# Altium PCB ETAPA DE POTENCIA (TERMINADA).PcbDoc
Units mm, origin at the board's own origin, x right, y up, seen from the top; angles counter-clockwise.
Board outline 150.5 x 70.87 mm, 2 copper layers (Top Layer, Bottom Layer); 61 components, 44 nets, 172 pads, 0 vias.
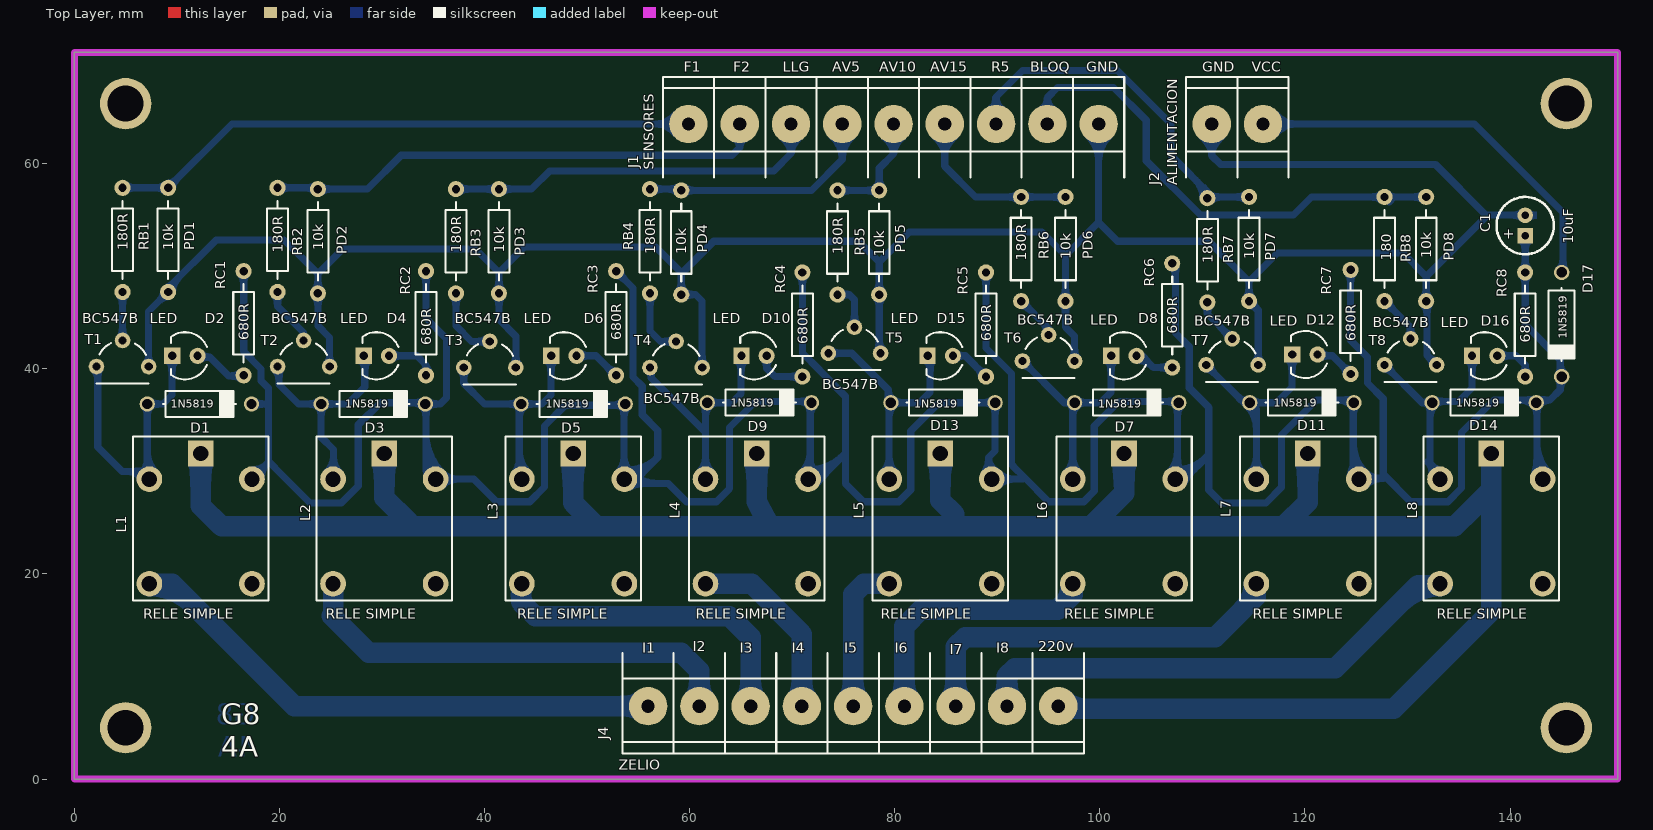
[diagram p0: Top Layer view]
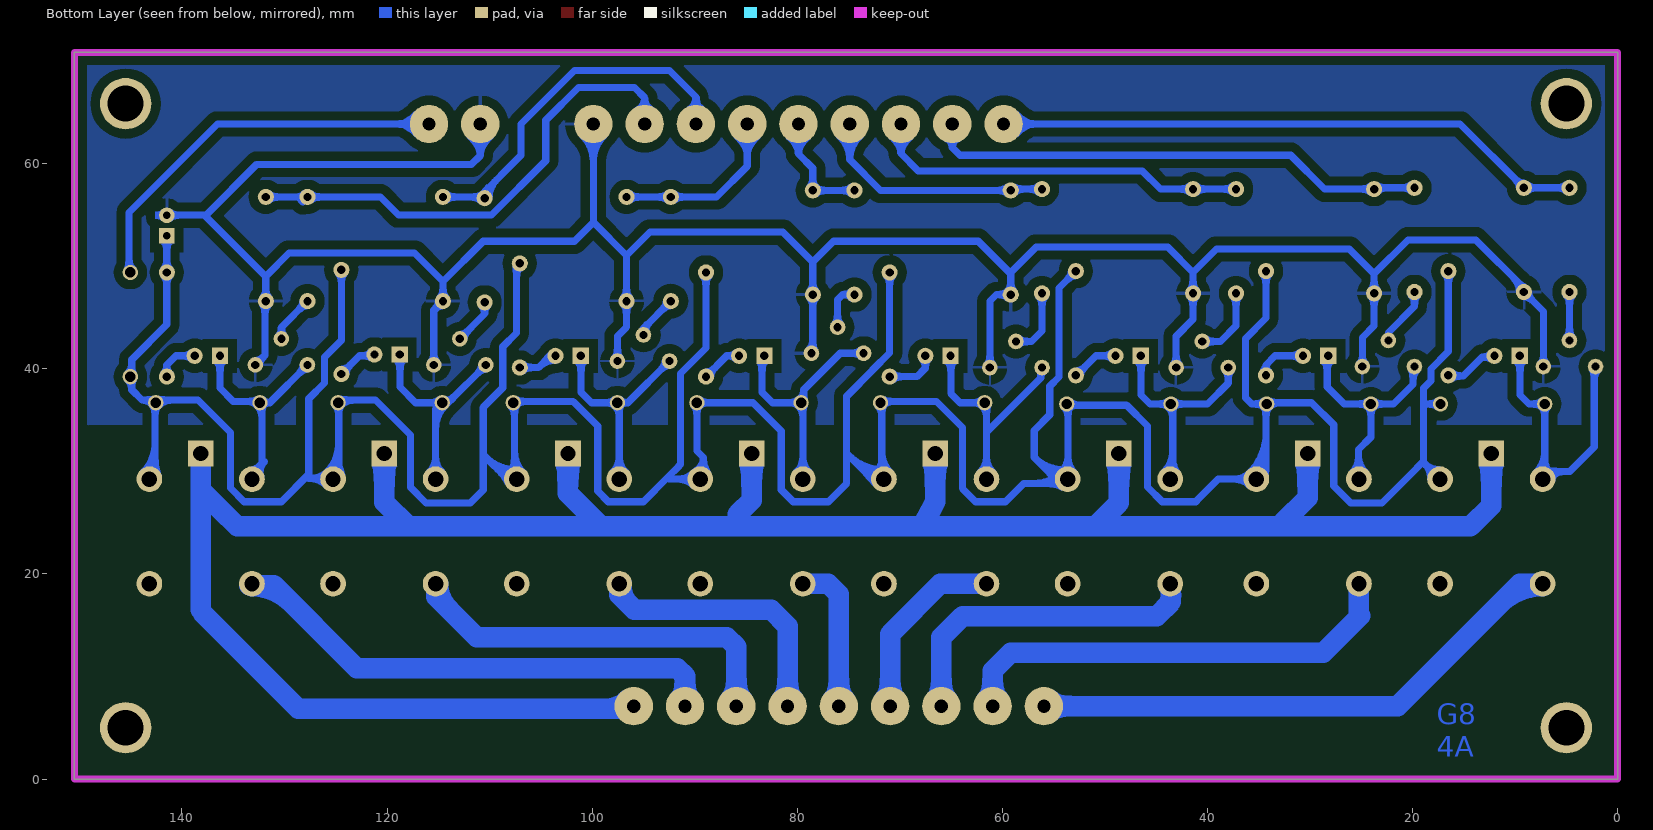
[diagram p1: Bottom Layer view, seen from below]

## Layer stack, top to bottom
Top Solder: solder mask 0.0102, Solder Resist, Dk 3.5
Top Layer: signal copper 0.0356
Dielectric1: dielectric 0.32, FR-4, Dk 4.8
Bottom Layer: signal copper 0.0356
Bottom Solder: solder mask 0.0102, Solder Resist, Dk 3.5

## Board outline
0,0 0,70.866 150.495,70.866 150.495,0

## Design rules (kind name [scope] priority, off if disabled: settings)
Clearance POLYGON [InPolygon] p1: gap=0.9
Clearance [All] p2: gap=0.3
PolygonConnect [All] p1: connectstyle=Relief reliefconductorwidth=0.254 reliefentries=4 polygonreliefangle="90 Angle" airgapwidth=0.254
RoutingVias [All] p1: holewidth=0.711 width=1.27 viastyle="Through Hole" minholewidth=0.711 minwidth=1.27 maxholewidth=0.711 maxwidth=1.27
SilkToSolderMaskClearance SilkscreenOverComponentPads [IsPad] p1: minsilkscreentomaskgap=0.254 clearancetoexposedcopper=TRUE
SolderMaskExpansion [All] p1: expansion=0.102
Width [All] p1: maxlimit=2 minlimit=0.254 preferedwidth=0.7 toplayer_maxwidth=0.254 toplayer_prefwidth=0.254 bottomlayer_minwidth=0.7 minimp=50.000000 maximp=50.000000 favimp=50.000000
29 further rules are at their usual default settings.

## Components (designator, comment, footprint, x,y, rotation, side; value= is the part's Value field where it differs from the comment)
C1 "10uF" CAP100RP 141.478,53.975 r90 top
D1 "" DO41 12.192,36.576 r0 top
D2 "LED" LED3 10.795,41.275 r180 top
D3 "1N5819" DO41 29.146,36.576 r0 top
D4 "LED" LED3 29.464,41.275 r180 top
D5 "1N5819" DO41 48.641,36.576 r0 top
D6 "LED" LED3 47.752,41.275 r180 top
D7 "1N5819" DO41 102.616,36.703 r0 top
D8 "LED" LED3 102.362,41.275 r180 top
D9 "1N5819" DO41 66.802,36.703 r0 top
D10 "LED" LED3 66.294,41.275 r180 top
D11 "1N5819" DO41 119.697,36.703 r0 top
D12 "LED" LED3 120.015,41.402 r180 top
D13 "1N5819" DO41 84.709,36.703 r0 top
D14 "1N5819" DO41 137.477,36.703 r0 top
D15 "LED" LED3 84.455,41.275 r180 top
D16 "LED" LED3 137.541,41.275 r180 top
D17 "1N5819" DO41 145.034,44.323 r270 top
J1 "SENSORES" BORNERA9 79.883,63.881 r270 top
J2 "ALIMENTACION" BORNERA2 113.411,63.881 r270 top
J4 "ZELIO" BORNERA9 75.946,7.112 r90 top
L1 "RELE SIMPLE" "RELE SERIE 964" 12.319,25.4 r270 top
L2 "RELE SIMPLE" "RELE SERIE 964" 30.226,25.4 r270 top
L3 "RELE SIMPLE" "RELE SERIE 964" 48.641,25.4 r270 top
L4 "RELE SIMPLE" "RELE SERIE 964" 66.548,25.4 r270 top
L5 "RELE SIMPLE" "RELE SERIE 964" 84.455,25.4 r270 top
L6 "RELE SIMPLE" "RELE SERIE 964" 102.362,25.4 r270 top
L7 "RELE SIMPLE" "RELE SERIE 964" 120.269,25.4 r270 top
L8 "RELE SIMPLE" "RELE SERIE 964" 138.176,25.4 r270 top
PD1 "10k" RES400 9.144,47.498 r90 top
PD2 "10k" RES400 23.749,47.371 r90 top
PD3 "10k" RES400 41.402,47.371 r90 top
PD4 "10k" RES400 59.182,47.244 r90 top
PD5 "10k" RES400 78.486,47.244 r90 top
PD6 "10k" RES400 96.647,46.609 r90 top
PD7 "10k" RES400 114.554,46.609 r90 top
PD8 "10k" RES400 131.826,46.609 r90 top
RB1 "180R" RES400 4.699,57.658 r270 top
RB2 "180R" RES400 19.812,57.658 r270 top
RB3 "180R" RES400 37.211,57.531 r270 top
RB4 "180R" RES400 56.134,57.531 r270 top
RB5 "180R" RES400 74.422,57.404 r270 top
RB6 "180R" RES400 92.329,56.769 r270 top
RB7 "180R" RES400 110.49,56.642 r270 top
RB8 "180" RES400 127.762,56.769 r270 top
RC1 "680R" RES400 16.51,49.53 r270 top
RC2 "680R" RES400 34.29,49.53 r270 top
RC3 "680R" RES400 52.832,49.53 r270 top
RC4 "680R" RES400 70.993,49.403 r270 top
RC5 "680R" RES400 88.9,49.403 r270 top
RC6 "680R" RES400 107.061,50.292 r270 top
RC7 "680R" RES400 124.46,49.657 r270 top
RC8 "680R" RES400 141.478,49.403 r270 top
T1 "BC547B" TO92 4.699,41.502 r180 top
T2 "BC547B" TO92 22.352,41.502 r180 top
T3 "BC547B" TO92 40.513,41.402 r180 top
T4 "BC547B" TO92 58.674,41.402 r180 top
T5 "BC547B" TO92 76.073,42.799 r180 top
T6 "BC547B" TO92 94.996,42.037 r180 top
T7 "BC547B" TO92 112.903,41.656 r180 top
T8 "BC547B" TO92 130.302,41.656 r180 top

## Footprints (in the part's own frame and the unit in brackets; to place one, negate y for a bottom-side part, rotate by r counter-clockwise, add the part's x,y. Pads: shape width x height; smd on the part's side, far side on the other; paste and mask are expansions set on the pad)
BORNERA2 [mm] "Bornera con Tornillos 5mm separación"
  round 3.75 hole 1.3: 1(0,2.5) 2(0,-2.5)
  silkscreen extent -4.6,-5 5.2,5, body extent -3.76,-4.89 3.94,5.61, height 10
BORNERA9 [mm] "Bornera con Tornillos 5mm separación"
  round 3.75 hole 1.3: 1(0,20) 2(0,15) 3(0,10) 4(0,5) 5(0,0) 6(0,-5) 7(0,-10) 8(0,-15) 9(0,-20)
  silkscreen extent -4.6,-22.5 5.2,22.5, body extent -3.76,-22.39 3.94,23.11, height 10.05
CAP100RP [mil] "Body diameter 5mm"
  rect 60x60 hole 30: 1(-39.37,0)
  round 60 hole 30: 2(39.37,0)
  silkscreen extent -110,-110 110,110, body extent -99,-99 99,100, height 454
DO41 [mm]
  round 1.5 hole 1.016: 1(-5.08,0) 2(5.08,0)
  silkscreen extent -3.56,-1.27 3.56,1.27, body extent -5.46,-1.19 5.46,1.37, height 2.03
LED3 [mil]
  round 62 hole 32: 1(-48,0)
  rect 62x62 hole 32: 2(49,0)
  silkscreen extent -84,-90 54,90, body extent -65,-64 65,65, height 19
"RELE SERIE 964" [mm]
  round 2.5 hole 1.5: B1(-3.85,-5) B2(-3.85,5) NA1(6.35,-5) NC1(6.35,5)
  rect 2.5x2.5 hole 1.5: C1(-6.35,0)
  silkscreen extent -7.99,-6.6 7.99,6.6, body extent -7.85,-6.1 7.85,6.2, height 13.66
RES400 [mil]
  round 62 hole 32: 1(0,0) 2(400,0)
  silkscreen extent 50,-40 350,40, body extent -12,-45 412,46, height 96
TO92 [mil]
  round 60 hole 32: 1(0,-50) 2(100,50) 3(-100,50)
  silkscreen extent -100,-39 100,115, body extent -110,-61 110,110, height 315

## Part data
C1: library part CAPPOL
D1 D3 D5 D7 D9 D11 D13 D14 D17: library part DIODO
J1 J4: library part "BORNERA 9"
J2: library part "BORNERA 2"
PD1 PD2 PD3 PD4 PD5 PD6 PD7 PD8 RB1 RB2 RB3 RB4 RB5 RB6 RB7 RB8 RC1 RC2 RC3 RC4 RC5 RC6 RC7 RC8: library part RES
T1 T2 T3 T4 T5 T6 T7 T8: library part "TRANSISTOR NPN"

## Free pads (board coordinates)
  round 5 hole 3.5: 0(5,5) 0(5,65.866) 0(145.495,5) 0(145.495,65.866)

## Nets (pads, with @x,y where several pads share a name; then routed paths per layer and width w, separated by ;. In a path a pad name is that pad's centre, name@x,y a point inside that pad or via, vN(x,y) a via of type N, cw(c..) or ccw(c..) an arc to the next point about the centre after c; other vN are vias at no path point)
220V: J4.9 L1.C1 L2.C1 L3.C1 L4.C1 L5.C1 L6.C1 L7.C1 L8.C1 | length 244.4
  Bottom Layer w0.7: L4.C1@66.167,31.75 L4.C1@66.167,32.131 ; L5.C1@83.947,31.75 L5.C1@83.947,32.131
  Bottom Layer w2: L1.C1@12.319,31.623 12.319,26.67 14.351,24.638 50.927,24.638 ; L2.C1 30.226,27.432 32.639,25.019 ; L3.C1 48.641,26.924 50.927,24.638 ; L4.C1 66.548,27.051 67.818,24.638 ; L5.C1 84.455,27.178 85.789,25.845 ; J4.9@96.012,7.366 96.52,6.858 128.651,6.858 137.922,16.129 ; J4.9@96.565,7.731 ccw(c98.672,9.838) 98.672,6.858 ; L6.C1 102.362,27.883 99.117,24.638 ; L7.C1 120.269,26.994 117.913,24.638 ; 135.763,25.781 136.271,26.289 ; 138.176,16.51 138.176,28.194 ; L8.C1 138.176,28.194 ; 50.927,24.638 99.117,24.638 ; 99.117,24.638 117.913,24.638 ; 117.913,24.638 134.62,24.638 136.271,26.289 ; 136.271,26.289 138.176,28.194
"AV.15 SEG.": J1.4 PD6.2 RB6.1 | length 22.1
  Bottom Layer w0.7: J1.4 84.883,59.77 87.884,56.769 RB6.1 PD6.2 ; RB6.1@92.02,56.46 ccw(c91.273,55.713) 91.273,56.769 ccw(c91.273,57.825) RB6.1@92.02,57.078 ; RB6.1@92.638,56.46 cw(c93.385,55.713) 93.385,56.769 cw(c93.385,57.825) RB6.1@92.638,57.078 ; PD6.2@96.338,56.46 ccw(c95.591,55.713) 95.591,56.769 ccw(c95.591,57.825) PD6.2@96.338,57.078
"AV. 5 SEG.": J1.6 PD4.2 RB4.1 | length 35.7
  Bottom Layer w0.7: RB4.1 PD4.2@59.944,57.531 ; RB4.1@56.443,57.222 cw(c57.19,56.475) 57.19,57.531 cw(c57.19,58.587) RB4.1@56.443,57.84 ; PD4.2 71.882,57.404 74.883,60.405 ; PD4.2@59.491,57.095 cw(c60.238,56.348) 60.238,57.404 cw(c60.238,58.46) PD4.2@59.491,57.713 ; J1.6@73.85,62.759 cw(c71.685,60.405) 74.883,60.405 ; J1.6@74.324,63.274 cw(c73.153,62.001) 74.883,62.001 cw(c76.613,62.001) J1.6@75.442,63.274 ; J1.6 74.883,60.405 ; J1.6@75.916,62.759 ccw(c78.082,60.405) 74.883,60.405
"AV. 10 SEG.": J1.5 PD5.2 RB5.1 | length 20
  Bottom Layer w0.7: RB5.1 PD5.2 78.486,59.563 79.883,60.96 ; RB5.1@74.731,57.095 cw(c75.478,56.348) 75.478,57.404 cw(c75.478,58.46) RB5.1@74.731,57.713 ; PD5.2@78.177,57.095 ccw(c77.43,56.348) 77.43,57.404 ccw(c77.43,58.46) 78.177,57.713 ccw(c77.43,58.46) 78.486,58.46 ccw(c79.542,58.46) PD5.2@78.795,57.713 ; J1.5@79.011,62.63 cw(c77.848,60.96) 79.883,60.96 ; J1.5 79.883,60.96 ; J1.5@80.755,62.63 ccw(c81.918,60.96) 79.883,60.96
BLOQUEO: J1.2 PD8.2 RB8.1 | length 57.1
  Bottom Layer w0.7: J1.2@94.16,65.224 ccw(c93.507,66.435) 94.883,66.435 ; J1.2 94.883,66.435 ; J1.2@95.606,65.224 cw(c96.259,66.435) 94.883,66.435 ; RB8.1@127.453,56.46 ccw(c126.706,55.713) 126.706,56.769 ccw(c126.706,57.825) RB8.1@127.453,57.078 ; RB8.1 120.65,56.769 118.886,55.005 109.812,55.005 104.528,60.289 104.528,64.255 101.346,67.437 95.885,67.437 94.883,66.435 ; RB8.1@128.071,56.46 cw(c128.818,55.713) 128.818,56.769 cw(c128.818,57.825) RB8.1@128.071,57.078 ; RB8.1@128.098,56.489 cw(c128.697,55.988) 128.697,56.769 ; RB8.1@128.098,57.049 ccw(c128.697,57.55) 128.697,56.769 ; RB8.1@128.23,56.301 128.697,56.769 ; PD8.2@131.517,56.46 ccw(c130.77,55.713) 130.77,56.769 ccw(c130.77,57.825) PD8.2@131.517,57.078 ; PD8.2 128.697,56.769
"FIN DE CARRERA 1": J1.9 PD1.2 RB1.1 | length 62.2
  Bottom Layer w0.7: RB1.1@5.008,57.349 cw(c5.755,56.602) 5.755,57.658 cw(c5.755,58.714) RB1.1@5.008,57.967 ; RB1.1@5.207,57.658 PD1.2 15.367,63.881 J1.9 ; PD1.2@8.835,57.349 ccw(c8.088,56.602) 8.088,57.658 ccw(c8.088,58.714) PD1.2@8.835,57.967 ; PD1.2@9.144,58.095 ccw(c9.144,59.151) 9.891,58.405 ccw(c10.637,57.658) PD1.2@9.581,57.658
"FIN DE CARRERA 2": J1.8 PD2.2 RB2.1 | length 54.6
  Bottom Layer w0.7: RB2.1 PD2.2@23.749,57.658 ; RB2.1@20.121,57.349 cw(c20.868,56.602) 20.868,57.658 cw(c20.868,58.714) RB2.1@20.121,57.967 ; PD2.2 28.575,57.531 31.877,60.833 64.135,60.833 64.883,61.581 ; PD2.2@24.058,57.222 cw(c24.805,56.475) 24.805,57.531 cw(c24.805,58.587) PD2.2@24.058,57.84 ; J1.8@64.289,62.476 cw(c63.911,61.581) 64.883,61.581 ; J1.8 64.883,61.581 ; J1.8@65.477,62.476 ccw(c65.855,61.581) 64.883,61.581
GND: C1.2 J1.1 J2.2 PD1.1 PD2.1 PD3.1 PD4.1 PD5.1 PD6.1 PD7.1 PD8.1 T1.3 T2.3 T3.3 T4.3 T5.3 T6.3 T7.3 T8.3 | length 329.3
  Bottom Layer w0.7: T1.3@6.948,40.523 ccw(c6.244,41.227) 7.239,41.227 ccw(c8.234,41.227) T1.3@7.53,40.523 ; 7.239,41.021 7.239,45.593 PD1.1 9.144,47.879 13.843,52.578 20.447,52.578 23.749,49.276 ; PD1.1@8.707,47.498 cw(c7.651,47.498) 8.397,46.751 cw(c9.144,46.005) PD1.1@9.144,47.061 ; PD1.1@9.581,47.498 cw(c11.557,47.498) 10.16,48.895 ; PD2.1@23.44,47.062 cw(c22.693,46.315) 23.749,46.315 ; PD2.1@23.44,47.68 ccw(c22.693,48.427) 23.749,48.427 ; 23.749,46.315 cw(c24.805,46.315) PD2.1@24.058,47.062 ; PD2.1@23.749,47.244 23.749,44.196 24.892,43.053 24.892,41.021 ; PD2.1 23.749,49.276 ; 23.749,48.427 ccw(c24.805,48.427) PD2.1@24.058,47.68 ; T2.3@24.601,40.523 ccw(c23.897,41.227) 24.892,41.227 ccw(c25.887,41.227) T2.3@25.183,40.523 ; PD3.1@41.093,47.062 cw(c40.346,46.315) 41.402,46.315 cw(c42.458,46.315) PD3.1@41.711,47.062 ; T3.3@42.762,40.423 ccw(c42.058,41.127) 43.053,41.127 ccw(c44.048,41.127) T3.3@43.344,40.423 ; T3.3 43.053,43.18 41.402,44.831 PD3.1 ; PD4.1@58.873,47.553 ccw(c58.126,48.3) 59.182,48.3 ccw(c60.238,48.3) 59.491,47.553 ccw(c60.238,48.3) 60.238,47.244 ccw(c60.238,46.188) PD4.1@59.491,46.935 ; 59.182,49.276 62.357,52.451 76.454,52.451 78.486,50.419 ; T4.3@60.923,40.423 ccw(c60.219,41.127) 61.214,41.127 ccw(c62.209,41.127) T4.3@61.505,40.423 ; T4.3 61.214,46.609 60.579,47.244 PD4.1 59.182,49.403 56.706,51.88 43.879,51.88 41.402,49.403 ; PD5.1@78.177,46.935 cw(c77.43,46.188) 78.486,46.188 cw(c79.542,46.188) PD5.1@78.795,46.935 ; 78.486,42.83 ccw(c79.914,42.83) T5.3@78.904,41.82 ; T5.3 78.486,41.656 PD5.1 ; PD6.1@96.338,46.3 cw(c95.591,45.553) 96.647,45.553 cw(c97.703,45.553) PD6.1@96.956,46.3 ; PD6.1@96.338,46.918 ccw(c95.591,47.665) 96.647,47.665 ; PD6.1@96.647,47.244 PD6.1 ; 96.647,47.665 ccw(c97.703,47.665) PD6.1@96.956,46.918 ; T6.3@97.245,41.058 ccw(c96.541,41.762) 97.536,41.762 ccw(c98.531,41.762) T6.3@97.827,41.058 ; T6.3 97.536,43.18 96.647,44.069 PD6.1 ; J1.1@98.805,62.803 cw(c96.201,60.199) 99.883,60.199 cw(c103.565,60.199) J1.1@100.961,62.803 ; J1.1@99.3,63.298 cw(c97.891,61.889) 99.883,61.889 cw(c101.875,61.889) J1.1@100.466,63.298 ; J1.1 99.883,54.29 96.647,51.054 ; 99.949,54.229 101.727,52.451 110.617,52.451 114.554,48.514 ; J2.2@109.984,62.67 cw(c108.547,60.793) 110.911,60.793 cw(c113.275,60.793) J2.2@111.838,62.67 ; J2.2 110.911,60.793 111.76,59.944 132.715,59.944 137.668,54.991 137.795,54.991 ; PD7.1@114.245,46.918 ccw(c113.498,47.665) 114.554,47.665 ccw(c115.61,47.665) PD7.1@114.863,46.918 ; T7.3@115.152,40.677 ccw(c114.448,41.381) 115.443,41.381 ccw(c116.438,41.381) T7.3@115.734,40.677 ; T7.3 115.443,45.72 PD7.1 114.554,48.514 ; PD8.1@131.517,46.3 cw(c130.558,45.341) 131.914,45.341 ; PD8.1@131.517,46.918 ccw(c130.77,47.665) 131.826,47.665 ccw(c132.882,47.665) PD8.1@132.135,46.918 ; 131.914,45.765 cw(c132.67,45.765) PD8.1@132.135,46.3 ; T8.3@132.43,40.386 ccw(c131.435,40.386) 132.139,41.089 ccw(c132.842,41.793) T8.3@132.842,40.798 ; T8.3 131.914,41.314 131.914,46.521 PD8.1 131.826,49.022 ; 140.445,54.991 cw(c140.445,53.942) C1.2@141.187,54.684 ; 140.522,54.991 ccw(c140.522,55.931) C1.2@141.187,55.266 ; C1.2@141.605,54.991 137.795,54.991 ; 23.749,49.276 26.162,51.689 39.116,51.689 41.402,49.403 ; PD3.1 41.402,49.403 ; PD3.1 41.402,49.403 ; 41.402,48.427 ccw(c42.458,48.427) 41.711,47.68 cw(c42.458,48.427) 41.402,48.427 ; 41.402,48.427 cw(c40.346,48.427) 41.093,47.68 ccw(c40.346,48.427) 41.402,48.427 ; PD5.1 78.486,50.419 ; PD5.1 78.486,50.419 ; 78.486,48.3 ccw(c79.542,48.3) 78.795,47.553 cw(c79.542,48.3) 78.486,48.3 ; 78.486,48.3 cw(c77.43,48.3) 78.177,47.553 ccw(c77.43,48.3) 78.486,48.3 ; 78.486,50.419 81.407,53.34 94.361,53.34 96.647,51.054 ; PD6.1 96.647,51.054 ; 114.554,48.514 117.334,51.294 129.554,51.294 131.826,49.022 ; 131.826,49.022 137.795,54.991
I1: J4.1 L1.NA1 | length 64.6
  Bottom Layer w2: L1.NA1@7.319,18.8 cw(c7.319,12.871) 11.512,17.063 ; L1.NA1@7.385,18.809 cw(c8.264,15.583) 10.628,17.947 ; L1.NA1@7.827,19.05 9.525,19.05 21.463,7.112 J4.1 ; J4.1@55.327,6.493 ccw(c53.834,5) 53.834,7.112 ccw(c53.834,9.224) J4.1@55.327,7.731
I2: J4.2 L2.NA1 | length 48
  Bottom Layer w2: L2.NA1 25.226,16.049 25.099,15.922 28.702,12.319 59.182,12.319 60.946,10.555 J4.2 ; J4.2@60.327,7.731 ccw(c58.834,9.224) 60.946,9.224 ccw(c63.058,9.224) J4.2@61.565,7.731
I3: J4.3 L3.NA1 | length 38.1
  Bottom Layer w2: L3.NA1@43.561,19.257 43.561,17.272 44.958,15.875 63.881,15.875 65.946,13.81 J4.3 ; L3.NA1@43.846,18.906 ccw(c45.189,17.964) 44.029,16.804 ; J4.3@65.327,7.731 ccw(c63.834,9.224) 65.946,9.224 ccw(c68.058,9.224) J4.3@66.565,7.731
I4: J4.4 L4.NA1 | length 21.8
  Bottom Layer w2: L4.NA1 66.04,19.05 70.946,14.144 J4.4 ; J4.4@70.327,7.731 ccw(c68.834,9.224) 70.946,9.224 ccw(c73.058,9.224) J4.4@71.565,7.731
I5: J4.5 L5.NA1 | length 18.2
  Bottom Layer w2: J4.5@75.327,7.731 ccw(c73.834,9.224) 75.946,9.224 ccw(c78.058,9.224) J4.5@76.565,7.731 ; J4.5 75.946,18.034 76.962,19.05 L5.NA1
I6: J4.6 L6.NA1 | length 32.1
  Bottom Layer w2: J4.6@80.327,7.731 ccw(c78.834,9.224) 80.946,9.224 ccw(c83.058,9.224) J4.6@81.565,7.731 ; J4.6 80.946,14.906 82.55,16.51 88.389,16.51 88.399,16.5 95.875,16.5 97.362,17.987 L6.NA1 ; 96.407,17.032 ccw(c94.668,18.77) L6.NA1@97.113,19.024
I7: J4.7 L7.NA1 | length 44.2
  Bottom Layer w2: J4.7@85.327,7.731 ccw(c83.834,9.224) 85.946,9.224 ccw(c88.058,9.224) J4.7@86.565,7.731 ; J4.7 85.946,12.921 86.868,13.843 111.252,13.843 115.189,17.78 L7.NA1@115.189,18.876 ; 114.001,16.592 ccw(c111.543,19.05) L7.NA1@115.019,19.05
I8: J4.8 L8.NA1 | length 60
  Bottom Layer w2: J4.8@90.327,7.731 ccw(c88.834,9.224) 90.946,9.224 ccw(c93.058,9.224) J4.8@91.565,7.731 ; J4.8 90.946,10.047 91.708,10.809 122.95,10.809 131.064,18.923 L8.NA1@133.463,18.923 ; 129.361,17.22 cw(c133.176,13.404) L8.NA1@133.176,18.8 ; 130.072,17.931 cw(c132.387,15.616) L8.NA1@133.12,18.806
"LLAVE GENERAL": J1.7 PD3.2 RB3.1 | length 45.8
  Bottom Layer w0.7: RB3.1 PD3.2 44.577,57.531 46.355,59.309 68.199,59.309 69.883,60.993 ; RB3.1@37.52,57.222 cw(c38.267,56.475) 38.267,57.531 cw(c38.267,58.587) RB3.1@37.52,57.84 ; PD3.2@41.093,57.222 ccw(c40.346,56.475) 40.346,57.531 ccw(c40.346,58.587) PD3.2@41.093,57.84 ; PD3.2@41.711,57.222 cw(c42.458,56.475) 42.458,57.531 cw(c42.458,58.587) PD3.2@41.711,57.84 ; J1.7@69.023,62.622 cw(c67.911,60.993) 69.883,60.993 ; J1.7 69.883,60.993 ; J1.7@70.743,62.622 ccw(c71.855,60.993) 69.883,60.993
NetD1_1: D1.1 D2.2 L1.B1 T1.2 | length 38.9
  Bottom Layer w0.7: T1.2@1.868,39.941 cw(c0.858,38.931) 2.286,38.931 ; T1.2@2.286,40.386 2.286,32.385 4.656,30.015 L1.B1@7.112,29.965 ; 5.135,30.005 cw(c5.076,27.097) L1.B1@7.175,29.112 ; L1.B1@6.683,29.886 ccw(c5.646,30.923) 7.112,30.923 ; D1.1@6.829,36.293 cw(c6.146,35.61) 7.112,35.61 cw(c8.078,35.61) 7.395,36.293 cw(c8.078,35.61) 8.078,36.576 cw(c8.078,37.542) D1.1@7.395,36.859 ; 7.112,31.923 ccw(c9.992,31.923) L1.B1@7.955,29.886 ; L1.B1@7.319,29.758 L1.B1@7.112,29.965 ; D2.2@9.241,40.966 cw(c8.556,40.28) 9.525,40.28 ; 9.525,40.158 cw(c10.668,40.158) D2.2@9.86,40.966 ; D2.2@9.525,41.402 9.525,37.465 8.636,36.576 D1.1 L1.B1@7.112,29.965
NetD2_1: D2.1 RC1.2 | length 7.1
  Bottom Layer w0.7: D2.1@11.887,40.894 12.141,41.148 13.208,41.148 15.049,39.307 RC1.2@16.447,39.307 ; 15.301,39.307 ccw(c15.301,40.579) RC1.2@16.201,39.679 ; 15.607,39.307 cw(c15.607,38.467) RC1.2@16.201,39.061
NetD3_1: D3.1 D4.2 L2.B1 T2.2 | length 33.8
  Bottom Layer w0.7: T2.2@19.521,39.941 cw(c18.478,38.898) 19.953,38.898 ; T2.2@19.953,40.373 19.953,38.467 21.844,36.576 D3.1@23.876,36.576 ; D3.1@23.778,36.819 D3.1@23.876,36.576 ; D3.1@23.783,36.859 cw(c23.1,37.542) 23.1,36.576 cw(c23.1,35.61) 23.783,36.293 cw(c23.1,35.61) 24.066,35.61 cw(c25.031,35.61) 24.349,36.293 cw(c25.031,35.61) 25.031,36.576 cw(c25.031,37.542) D3.1@24.349,36.859 ; L2.B1@24.59,29.886 ccw(c22.94,31.536) 25.273,31.536 ; L2.B1@25.273,29.337 25.273,32.131 24.066,33.338 D3.1 ; 25.273,31.309 ccw(c27.285,31.309) L2.B1@25.862,29.886 ; D4.2@27.91,40.966 cw(c26.918,39.974) 28.321,39.974 ; 28.321,40.464 cw(c29.03,40.464) D4.2@28.529,40.966 ; D4.2@28.321,41.529 28.321,38.227 26.67,36.576 D3.1 ; D3.1@23.876,36.576 D3.1
NetD4_1: D4.1 RC2.2 | length 9.7
  Bottom Layer w0.7: D4.1@30.556,41.275 33.401,41.275 34.29,40.386 ; D4.1@30.992,40.966 cw(c31.739,40.219) 31.739,41.275 cw(c31.739,42.331) D4.1@30.993,41.584 ; RC2.2@33.989,39.688 ccw(c33.329,40.386) 34.29,40.386 ; 34.047,40.629 cw(c32.825,39.407) RC2.2@34.553,39.363 ; RC2.2 34.29,40.386 ; RC2.2@34.591,39.688 cw(c35.251,40.386) 34.29,40.386
NetD5_1: D5.1 D6.2 L3.B1 T3.2 | length 32.8
  Bottom Layer w0.7: T3.2@37.682,39.841 cw(c36.978,39.137) 37.973,39.137 cw(c38.968,39.137) T3.2@38.264,39.841 ; T3.2 37.973,38.608 40.005,36.576 D5.1@43.387,36.576 ; L3.B1@43.005,29.886 ccw(c42.081,30.81) 43.387,30.81 ; D5.1@43.278,36.293 ccw(c42.595,35.61) 42.595,36.576 ccw(c42.595,37.542) D5.1@43.278,36.859 ; L3.B1@43.387,29.631 D5.1@43.387,36.576 ; 43.387,32.036 ccw(c46.427,32.036) L3.B1@44.277,29.886 ; 43.387,35.19 cw(c44.947,35.19) 43.844,36.293 cw(c44.527,35.61) 44.527,36.576 cw(c44.527,37.542) D5.1@43.844,36.859 ; D6.2@46.198,40.966 cw(c45.513,40.28) 46.482,40.28 ; 46.482,40.158 cw(c47.625,40.158) D6.2@46.817,40.966 ; D6.2@46.482,41.148 46.482,37.465 45.593,36.576 D5.1 D5.1@43.387,36.576
NetD6_1: D6.1 RC3.2 | length 5.9
  Bottom Layer w0.7: D6.1 50.864,41.275 RC3.2@52.515,39.624 ; D6.1@49.281,40.966 cw(c50.027,40.219) 50.027,41.275 cw(c50.027,42.331) D6.1@49.281,41.584
NetD7_1: D7.1 D8.2 L6.B1 T6.2 | length 32.4
  Bottom Layer w0.7: T6.2@92.456,40.355 cw(c92.456,39.36) 93.159,40.064 cw(c93.863,40.767) T6.2@92.868,40.767 ; T6.2 96.52,36.703 D7.1 ; L6.B1@96.647,29.838 L6.B1@96.727,29.758 ; L6.B1@96.726,29.886 ccw(c95.189,31.423) 97.362,31.423 ccw(c99.535,31.423) L6.B1@97.998,29.886 ; D7.1@97.253,36.42 ccw(c96.57,35.737) 96.57,36.703 ccw(c96.57,37.669) D7.1@97.253,36.986 ; L6.B1@97.362,29.758 97.362,36.529 D7.1 ; 97.362,35.317 cw(c98.922,35.317) 97.819,36.42 cw(c98.502,35.737) 98.502,36.703 cw(c98.502,37.669) D7.1@97.819,36.986 ; D8.2@100.808,40.966 cw(c100.123,40.28) 101.092,40.28 ; 101.092,40.158 cw(c102.235,40.158) D8.2@101.427,40.966 ; D8.2@101.092,41.402 101.092,37.719 100.076,36.703 D7.1
NetD8_1: D8.1 RC6.2 | length 7.2
  Bottom Layer w0.7: D8.1@103.581,40.838 cw(c103.581,38.555) 105.195,40.169 ; D8.1@104.089,41.275 105.232,40.132 RC6.2@107.379,40.132 ; RC6.2@106.752,39.823 ccw(c106.005,39.076) 106.005,40.132 ccw(c106.005,41.188) RC6.2@106.752,40.441
NetD9_1: D9.1 D10.2 L4.B1 T4.2 | length 31.5
  Bottom Layer w0.7: T4.2@55.901,39.792 cw(c55.431,39.108) 56.261,39.108 ; T4.2@56.261,40.005 56.261,39.116 61.548,33.829 ; L4.B1@60.912,29.886 ccw(c59.375,31.423) 61.548,31.423 ccw(c63.721,31.423) L4.B1@62.184,29.886 ; L4.B1@61.548,29.631 61.548,33.829 ; 61.548,35.317 cw(c63.108,35.317) 62.005,36.42 cw(c62.688,35.737) 62.688,36.703 cw(c62.688,37.669) D9.1@62.005,36.986 ; D10.2@64.74,40.966 cw(c64.055,40.28) 65.024,40.28 ; 65.024,40.158 cw(c66.167,40.158) D10.2@65.359,40.966 ; D10.2@65.024,41.275 65.024,37.592 64.135,36.703 D9.1 61.548,36.529 61.548,33.829
NetD10_1: D10.1 RC4.2 | length 7.8
  Bottom Layer w0.7: D10.1@67.204,40.966 cw(c66.457,40.219) 67.513,40.219 cw(c68.569,40.219) D10.1@67.823,40.966 ; D10.1 67.513,40.056 68.326,39.243 70.295,39.243 RC4.2@70.422,39.37 ; 69.937,39.243 ccw(c69.937,40.299) RC4.2@70.684,39.552 ; 69.937,39.243 cw(c69.937,38.187) RC4.2@70.684,38.934
NetD11_1: D11.1 D12.2 L7.B1 T7.2 | length 32.6
  Bottom Layer w0.7: T7.2@110.363,39.974 cw(c110.363,38.979) 111.066,39.683 cw(c111.77,40.386) T7.2@110.775,40.386 ; T7.2 114.046,36.703 D11.1 ; D11.1@114.334,36.42 cw(c112.077,34.163) 115.269,34.163 ; L7.B1@114.633,29.886 ccw(c113.096,31.423) 115.269,31.423 ccw(c117.442,31.423) L7.B1@115.905,29.886 ; D11.1@114.829,36.915 cw(c113.767,35.853) 115.269,35.853 ; D11.1@114.9,36.42 cw(c115.582,35.737) 115.582,36.703 cw(c115.582,37.669) D11.1@114.9,36.986 ; L7.B1@115.269,29.758 115.269,36.051 D11.1 ; D12.2@118.461,41.093 cw(c117.776,40.407) 118.745,40.407 ; 118.745,40.285 cw(c119.888,40.285) D12.2@119.08,41.093 ; D12.2@118.745,41.275 118.745,38.227 117.221,36.703 D11.1
NetD12_1: D12.1 RC7.2 | length 6
  Bottom Layer w0.7: D12.1@120.853,41.275 122.682,41.275 RC7.2 ; RC7.2@124.023,39.497 ccw(c122.967,39.497) 123.713,40.244 ccw(c124.46,40.99) RC7.2@124.46,39.934
NetD13_1: D13.1 D15.2 L5.B1 T5.2 | length 31.4
  Bottom Layer w0.7: T5.2 75.819,41.529 79.375,37.973 D13.1@79.375,36.703 ; T5.2@73.824,41.238 cw(c74.528,40.534) 74.528,41.529 cw(c74.528,42.524) T5.2@73.824,41.82 ; L5.B1@78.819,29.886 ccw(c77.282,31.423) 79.455,31.423 ccw(c81.628,31.423) L5.B1@80.091,29.886 ; L5.B1@78.947,29.631 L5.B1@78.976,29.66 ; L5.B1@79.455,29.631 79.455,36.623 D13.1@79.375,36.703 ; 79.455,35.317 cw(c81.015,35.317) 79.912,36.42 cw(c80.595,35.737) 80.595,36.703 cw(c80.595,37.669) D13.1@79.912,36.986 ; D15.2@83.058,41.021 83.439,40.64 83.439,37.719 82.423,36.703 D13.1 D13.1@79.375,36.703
NetD14_1: D14.1 D16.2 L8.B1 T8.2 | length 30.4
  Bottom Layer w0.7: T8.2@127.762,39.974 cw(c127.762,38.979) 128.465,39.683 cw(c129.169,40.386) T8.2@128.174,40.386 ; T8.2 131.445,36.703 ; 131.953,30.981 cw(c130.919,29.947) L8.B1@132.316,29.516 ; D14.1@132.111,36.423 ccw(c131.445,35.771) 131.445,36.703 ; D14.1@132.111,36.983 cw(c131.445,37.635) 131.445,36.703 ; 132.207,35.279 cw(c133.821,35.279) 132.68,36.42 cw(c133.669,35.431) 133.669,36.83 ; D14.1 D14.1@132.207,36.703 ; D14.1@132.461,36.83 135.001,36.83 136.296,38.125 D16.2 ; 132.507,30.427 ccw(c133.176,31.096) L8.B1@133.176,30.15 ; L8.B1@133.176,29.758 132.207,30.727 D14.1@132.207,36.703 ; D16.2@135.987,40.966 cw(c135.24,40.219) 136.296,40.219 cw(c137.352,40.219) D16.2@136.606,40.966 ; 131.445,36.703 D14.1@132.207,36.703
NetD15_1: D15.1 RC5.2 | length 7.4
  Bottom Layer w0.7: D15.1 86.868,41.275 RC5.2 ; D15.1@85.984,40.966 cw(c86.73,40.219) 86.73,41.275 cw(c86.73,42.331) D15.1@85.984,41.584 ; RC5.2@88.463,39.243 ccw(c87.407,39.243) 88.153,39.99 ccw(c88.9,40.736) RC5.2@88.9,39.68
NetD16_1: D16.1 RC8.2 | length 7.5
  Bottom Layer w0.7: D16.1 140.589,41.275 141.478,40.386 RC8.2 ; D16.1@139.07,40.966 cw(c139.816,40.219) 139.816,41.275 cw(c139.816,42.331) D16.1@139.07,41.584 ; RC8.2@141.169,39.552 ccw(c140.422,40.299) 141.478,40.299 ccw(c142.534,40.299) RC8.2@141.787,39.552
NetD17_1: D17.1 J2.1 | length 40
  Bottom Layer w0.7: J2.1 136.525,63.881 145.161,55.245 145.161,49.911 D17.1@144.653,49.403 ; D17.1@144.751,49.686 ccw(c143.762,50.675) 145.161,50.675
NetRB1_2: RB1.2 T1.1 | length 7.4
  Bottom Layer w0.7: RB1.2@4.39,47.189 cw(c3.643,46.442) 4.699,46.442 cw(c5.755,46.442) RB1.2@5.008,47.189 ; T1.1@4.408,43.063 ccw(c3.704,43.767) 4.699,43.767 ccw(c5.694,43.767) T1.1@4.99,43.063 ; T1.1 RB1.2@4.699,46.99
NetRB2_2: RB2.2 T2.1 | length 6.6
  Bottom Layer w0.7: RB2.2@19.503,47.189 cw(c18.756,46.442) 19.812,46.442 cw(c20.868,46.442) RB2.2@20.121,47.189 ; RB2.2 19.812,46.101 22.352,43.561
NetRB3_2: RB3.2 T3.1 | length 10.3
  Bottom Layer w0.7: RB3.2@36.902,47.062 cw(c36.155,46.315) 37.211,46.315 cw(c38.267,46.315) RB3.2@37.52,47.062 ; RB3.2 37.211,44.196 38.735,42.672 T3.1 ; T3.1@40.222,42.381 ccw(c39.518,41.677) 39.518,42.672 ccw(c39.518,43.667) T3.1@40.222,42.963
NetRB4_2: RB4.2 T4.1 | length 9.9
  Bottom Layer w0.7: RB4.2@55.825,47.062 cw(c55.078,46.315) 56.134,46.315 cw(c57.19,46.315) RB4.2@56.443,47.062 ; RB4.2 56.134,43.688 57.15,42.672 T4.1 ; T4.1@58.383,42.381 ccw(c57.679,41.677) 57.679,42.672 ccw(c57.679,43.667) T4.1@58.383,42.963
NetRB5_2: RB5.2 T5.1 | length 7.7
  Bottom Layer w0.7: RB5.2 75.565,47.244 76.073,46.736 T5.1 ; RB5.2@74.731,46.935 cw(c75.478,46.188) 75.478,47.244 cw(c75.478,48.3) RB5.2@74.731,47.553 ; T5.1@75.782,44.36 ccw(c75.078,45.064) 76.073,45.064 ccw(c77.068,45.064) T5.1@76.364,44.36
NetRB6_2: RB6.2 T6.1 | length 6.1
  Bottom Layer w0.7: RB6.2@92.329,46.172 cw(c92.329,45.116) 93.076,45.862 cw(c93.822,46.609) RB6.2@92.766,46.609 ; RB6.2 94.996,43.942 T6.1
NetRB7_2: RB7.2 T7.1 | length 7.8
  Bottom Layer w0.7: RB7.2@110.181,46.173 cw(c109.434,45.426) 110.49,45.426 cw(c111.546,45.426) RB7.2@110.799,46.173 ; RB7.2 110.49,45.339 T7.1 ; T7.1@112.491,42.926 ccw(c111.496,42.926) 112.2,43.629 ccw(c112.903,44.333) T7.1@112.903,43.338
NetRB8_2: RB8.2 T8.1 | length 8
  Bottom Layer w0.7: RB8.2@127.762,46.172 cw(c127.762,45.116) 128.509,45.862 cw(c129.255,46.609) RB8.2@128.199,46.609 ; RB8.2 130.302,44.069 T8.1 ; T8.1@130.011,43.217 ccw(c129.307,43.921) 130.302,43.921 ccw(c131.297,43.921) T8.1@130.593,43.217
"RET. 5 SEG.": J1.3 PD7.2 RB7.1 | length 47.1
  Bottom Layer w0.7: J1.3 89.883,66.515 92.456,69.088 101.727,69.088 106.934,63.881 106.934,60.833 110.998,56.769 PD7.2 110.617,56.769 RB7.1 ; 109.294,58.473 cw(c107.464,56.642) RB7.1@110.053,56.642 ; 113.498,56.769 ccw(c113.498,57.825) 114.245,57.078 cw(c113.498,57.825) 113.498,56.769 ; 113.498,56.769 cw(c113.498,55.713) 114.245,56.46 ccw(c113.498,55.713) 113.498,56.769 ; RB7.1@110.799,56.333 cw(c111.853,55.279) 111.853,56.769 ccw(c111.853,55.279) RB7.1@110.799,56.333
VCC: C1.1 D1.2 D3.2 D5.2 D7.2 D9.2 D11.2 D13.2 D14.2 D17.2 L1.B2 L2.B2 L3.B2 L4.B2 L5.B2 L6.B2 L7.B2 L8.B2 RC1.1 RC2.1 RC3.1 RC4.1 RC5.1 RC6.1 RC7.1 RC8.1 | length 514.3
  Bottom Layer w0.7: RC1.1@16.201,49.221 cw(c15.454,48.474) 16.51,48.474 cw(c17.566,48.474) RC1.1@16.819,49.221 ; RC1.1@16.51,48.768 16.51,41.686 18.2,39.996 18.2,38.841 18.923,38.118 18.923,30.988 19.558,30.353 ; D1.2 18.669,36.576 18.796,36.449 ; L1.B2 18.796,30.727 ; L1.B2@17.344,30.15 ccw(c17.4,32.123) 18.796,30.727 ; D1.2@17.555,36.293 cw(c18.238,35.61) 18.238,36.576 cw(c18.238,37.542) D1.2@17.555,36.859 ; L1.B2@18.219,29.275 cw(c20.192,29.331) 18.796,30.727 ; 19.419,30.492 22.987,26.924 26.035,26.924 27.686,28.575 27.686,34.544 29.845,36.703 D3.2@34.544,36.703 ; 32.954,36.703 cw(c32.954,35.304) 33.943,36.293 cw(c33.105,35.455) 34.29,35.455 ; RC2.1@33.981,49.221 cw(c33.234,48.474) 34.29,48.474 ; 34.29,30.303 ccw(c36.279,30.303) L2.B2@34.872,28.896 ; 34.29,31.993 ccw(c37.969,31.993) L2.B2@35.367,29.391 ; 34.29,33.683 ccw(c39.659,33.683) 35.862,29.886 ccw(c37.399,31.423) 37.399,29.25 ccw(c37.399,27.077) L2.B2@35.862,28.614 ; 34.29,35.765 cw(c35.037,35.765) 34.509,36.293 cw(c35.191,35.61) 35.191,36.576 cw(c35.192,37.542) D3.2@34.509,36.859 ; 34.29,48.474 cw(c35.346,48.474) RC2.1@34.599,49.221 ; RC2.1@34.29,49.657 34.29,44.958 36.299,42.949 36.299,37.188 35.687,36.576 34.29,36.576 34.29,30.48 L2.B2@35.226,29.544 ; L2.B2@35.433,29.337 L2.B2@35.226,29.544 ; 52.449,36.449 ccw(c52.449,37.848) D5.2@53.438,36.859 ; RC3.1@52.832,49.093 cw(c52.832,48.037) 53.579,48.783 cw(c54.325,49.53) RC3.1@53.269,49.53 ; RC3.1 54.469,47.893 54.469,39.211 55.372,38.308 55.372,35.528 56.896,34.004 56.896,31.369 ; L3.B2@53.005,29.886 ccw(c51.582,31.309) 53.594,31.309 ; L3.B2@53.467,28.956 53.594,28.829 57.912,28.829 59.69,27.051 62.611,27.051 63.881,28.321 63.881,34.29 66.421,36.83 71.755,36.83 71.755,29.21 L4.B2@71.548,29.21 ; L3.B2@53.594,29.083 54.61,29.083 56.896,31.369 ; L3.B2@53.594,29.591 53.594,36.449 47.879,36.449 45.847,34.417 45.847,28.486 44.412,27.051 41.148,27.051 40.767,27.432 38.949,29.25 L2.B2 L2.B2@35.226,29.544 ; 53.594,31.536 ccw(c55.927,31.536) 54.277,29.886 ccw(c56.83,32.439) 56.83,28.829 ; 53.594,35.304 cw(c54.993,35.304) D5.2@54.004,36.293 ; L3.B2@53.652,29.45 ccw(c53.813,32.243) 55.792,30.265 ; L3.B2@53.693,30.149 ccw(c53.933,34.332) 56.896,31.369 ; L3.B2@53.782,29.391 ccw(c55.14,30.749) 55.14,28.829 ; 70.61,36.83 cw(c70.61,35.431) D9.2@71.599,36.42 ; RC4.1@70.684,49.094 cw(c69.937,48.347) 70.993,48.347 cw(c72.049,48.347) RC4.1@71.302,49.094 ; L4.B2@70.912,29.886 ccw(c68.876,31.923) 71.755,31.923 ; RC4.1@70.993,49.276 70.993,41.559 72.63,39.921 72.63,39.892 75.184,37.338 75.184,28.829 76.962,27.051 80.391,27.051 81.555,28.215 81.555,33.93 84.328,36.703 D13.2 89.789,32.004 89.154,31.369 ; L4.B2 72.684,29.25 75.057,31.623 ; L4.B2@71.548,29.45 ccw(c71.548,32.675) 73.829,30.395 ; L4.B2@71.548,30.15 ccw(c71.548,35.065) 75.024,31.59 ; 71.755,30.923 ccw(c73.221,30.923) L4.B2@72.184,29.886 ; 71.755,35.431 cw(c73.154,35.431) D9.2@72.165,36.42 ; RC5.1@88.591,49.094 cw(c87.844,48.347) 88.9,48.347 ; RC5.1@88.646,49.53 RC5.1@88.837,49.34 ; L5.B2@88.819,29.886 ccw(c88.009,30.696) 89.154,30.696 ; 88.9,48.347 cw(c89.956,48.347) RC5.1@89.209,49.094 ; RC5.1 88.9,42.037 91.389,39.548 91.389,30.667 91.555,30.501 91.555,30.492 92.647,29.401 ; L5.B2@89.154,29.718 89.154,31.369 ; L5.B2 92.496,29.25 92.647,29.401 ; D13.2@89.506,36.986 cw(c88.823,37.669) 88.823,36.703 cw(c88.823,35.737) 89.506,36.42 cw(c88.823,35.737) 89.789,35.737 cw(c90.755,35.737) D13.2@90.072,36.42 ; L5.B2@89.917,30.022 cw(c90.724,31.369) 89.154,31.369 ; L5.B2@90.091,28.614 cw(c91.628,27.077) 91.628,29.25 cw(c91.628,31.423) L5.B2@90.091,29.886 ; 106.424,36.83 cw(c106.424,35.431) D7.2@107.413,36.42 ; L6.B2@106.726,29.886 ccw(c104.69,31.923) 107.569,31.923 ; RC6.1 107.379,50.292 107.379,43.497 108.712,42.164 108.712,38.153 110.617,36.248 110.617,28.194 111.887,26.924 116.205,26.924 117.729,28.448 117.729,33.549 121.137,36.957 124.714,36.957 124.714,29.845 L7.B2@125.349,29.21 ; L6.B2@107.359,29.254 107.569,29.464 107.569,36.83 101.854,36.83 99.462,34.438 99.462,28.088 98.425,27.051 94.996,27.051 92.647,29.401 ; L6.B2 108.244,29.25 110.617,31.623 ; L6.B2@107.362,29.45 ccw(c107.362,32.062) 109.209,30.215 ; L6.B2@107.362,30.15 ccw(c107.362,34.452) 110.404,31.41 ; 107.569,30.923 ccw(c109.035,30.923) L6.B2@107.998,29.886 ; 107.569,35.431 cw(c108.968,35.431) D7.2@107.979,36.42 ; 123.198,36.957 cw(c123.198,35.124) 124.494,36.42 cw(c123.963,35.889) 124.714,35.889 ; RC7.1@124.151,49.348 cw(c123.404,48.601) 124.46,48.601 cw(c125.516,48.601) RC7.1@124.769,49.348 ; RC7.1 124.46,42.772 126.097,41.134 126.097,38.622 127.635,37.084 127.635,29.718 ; 124.714,31.073 ccw(c127.092,31.073) L7.B2@125.41,29.391 ; 124.714,32.763 ccw(c128.782,32.763) 125.905,29.886 ccw(c127.232,31.213) 127.232,29.337 ; 124.714,35.586 cw(c125.894,35.586) D11.2@125.06,36.42 ; L7.B2@125.269,29.972 125.904,29.337 127.635,29.337 ; L7.B2@125.909,28.617 cw(c127.635,26.908) 127.635,29.337 ; 140.978,36.957 cw(c140.978,35.124) 142.274,36.42 cw(c141.436,35.582) 142.621,35.582 ; RC8.1@141.169,49.094 cw(c140.422,48.347) 141.478,48.347 cw(c142.534,48.347) RC8.1@141.787,49.094 ; RC8.1@141.169,49.712 ccw(c140.422,50.459) 141.478,50.459 ccw(c142.534,50.459) RC8.1@141.787,49.712 ; C1.1@141.187,52.684 cw(c140.483,51.98) 141.478,51.98 cw(c142.473,51.98) C1.1@141.769,52.684 ; C1.1@141.478,53.086 RC8.1 141.478,44.323 144.907,40.894 144.907,37.973 143.891,36.957 ; D14.2 142.621,36.639 142.621,30.226 L8.B2@143.002,29.845 ; 142.621,31.073 ccw(c144.999,31.073) L8.B2@143.317,29.391 ; 142.621,32.763 ccw(c146.689,32.763) L8.B2@143.812,29.886 ; 142.621,35.892 cw(c143.368,35.892) D14.2@142.84,36.42 ; D14.2@142.873,36.458 cw(c143.891,35.669) 143.891,36.957 ; 144.907,37.971 cw(c146.306,37.971) D17.2@145.317,38.96 ; 144.907,40.515 ccw(c146.306,40.515) D17.2@145.317,39.526 ; 127.635,29.337 127.635,29.718 ; 127.635,29.718 130.302,27.051 133.947,27.051 135.276,28.38 135.276,33.803 138.43,36.957 143.891,36.957
pads on no net: L1.NC1 L2.NC1 L3.NC1 L4.NC1 L5.NC1 L6.NC1 L7.NC1 L8.NC1

## Polygon pours and split planes (outlines as drawn)
GND on Bottom Layer "Bottom Layer-No Net" (solid, pour order 2): 0.127,70.739 0.254,70.612 150.622,70.612 150.622,33.528 150.368,33.274 149.098,34.544 0,34.544

## Keep-outs
Keep-Out Layer:
  the board outline again, w0.7

## Other copper
Bottom Layer:
  text "G8" at 17.653,5.334 h2
  text "4A" at 17.653,2.159 h2

## Silkscreen, mask and mechanical layers (free items; w line width, h text height)
Top Overlay:
  text "F1" at 59.436,68.961 h1
  text "F2" at 64.262,68.961 h1
  text "LLG" at 69.088,68.961 h1
  text "AV5" at 73.914,68.961 h1
  text "AV10" at 78.486,68.961 h1
  text "AV15" at 83.439,68.961 h1
  text "R5" at 89.408,68.961 h1
  text "BLOQ" at 93.218,68.961 h1
  text "GND" at 98.679,68.961 h1
  text "GND" at 109.982,68.961 h1
  text "VCC" at 114.808,68.961 h1
  text "1N5819" at 9.398,36.195 h0.8
  text "I2" at 60.325,12.446 h1
  text "220v" at 93.98,12.446 h1
  text "I1" at 55.372,12.319 h1
  text "I3" at 64.897,12.319 h1
  text "I4" at 69.977,12.319 h1
  text "I5" at 75.057,12.319 h1
  text "I6" at 80.01,12.319 h1
  text "I8" at 89.916,12.319 h1
  text "I7" at 85.344,12.192 h1
  text "G8" at 14.321,5.334 h2
  text "4A" at 14.321,2.159 h2

## Text inside footprints (layer, text, board x,y; h text height)
C1: Top Overlay "+" at 140.31,52.527 h1.02 r90